# EAGLE board CMSIS-DAP (EAGLE 6.1)
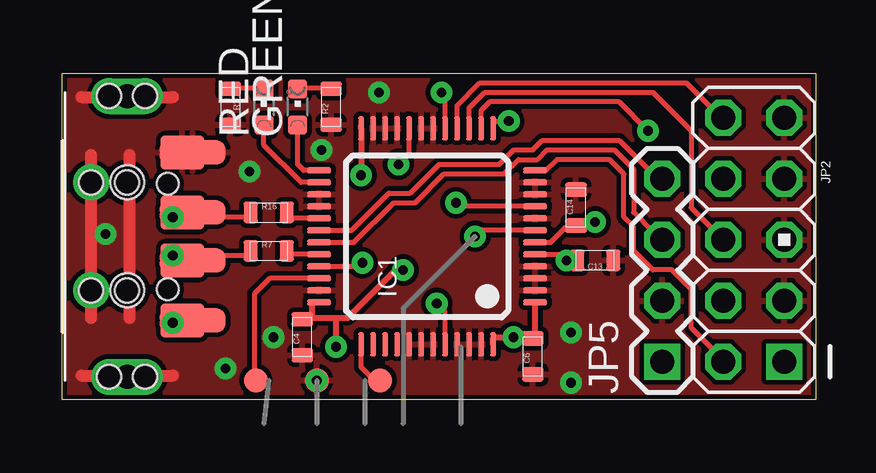
[diagram p0: board, top side]
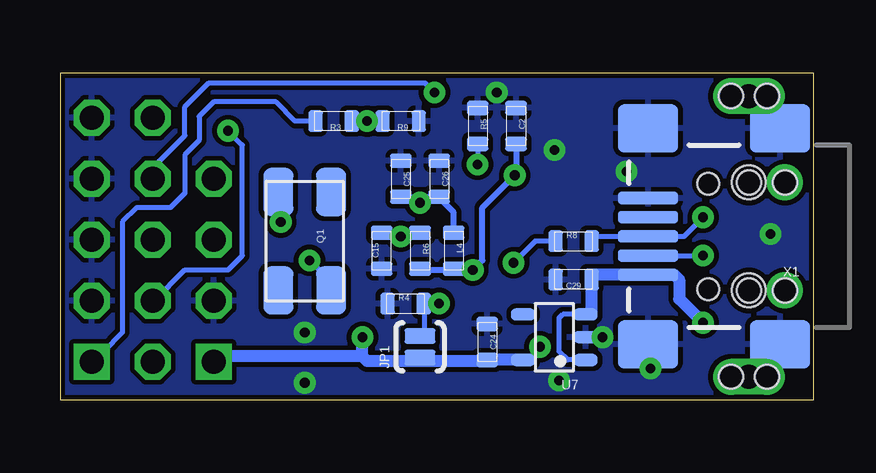
[diagram p1: board, bottom side, seen from below]

Size 31.4 x 13.6 mm. Coordinates in mm from the lower left corner, seen from the top.
Outline: 0,0 0,13.6 31.4,13.6 31.4,0 0,0
Copper layers (1*16): Top 0.035mm / dielectric 1.5mm / Bottom 0.035mm
Design rules: minimum track width 0.2mm, minimum drill 0.4mm, track to track 0.2mm, track to pad 0.2mm, pad to pad 0.2mm, via to via 0.2mm, smd to smd 0mil, copper to edge 0.2mm, drill to drill 0.2mm, minimum pad ring 0.25mm, minimum via ring 0.25mm, stop-mask expansion 4mil, vias tented up to drill 0.4mm, thermal gap 0.2mm

## Footprints (pad centres in the part's own frame; a part is rotated, then mirrored left to right if it is on the bottom)
0603 = smd 0.6 x 0.9: 1 -0.75,0; 2 0.75,0
PAD.1X1 = smd 1 x 1: P$1 0,0
CHIPLED_0603 = smd 0.8 x 0.8: A 0,-0.75; C 0,0.75
TQFP48 = smd 0.25 x 1: 1 -2.75,-4.5; 2 -2.25,-4.5; 3 -1.75,-4.5; 4 -1.25,-4.5; 5 -0.75,-4.5; 6 -0.25,-4.5; 7 0.25,-4.5; 8 0.75,-4.5; 9 1.25,-4.5; 10 1.75,-4.5; 11 2.25,-4.5; 12 2.75,-4.5; 25 2.75,4.5; 26 2.25,4.5; 27 1.75,4.5; 28 1.25,4.5; 29 0.75,4.5; 30 0.25,4.5; 31 -0.25,4.5; 32 -0.75,4.5; 33 -1.25,4.5; 34 -1.75,4.5; 35 -2.25,4.5; 36 -2.75,4.5 | smd 1 x 0.25: 13 4.5,-2.75; 14 4.5,-2.25; 15 4.5,-1.75; 16 4.5,-1.25; 17 4.5,-0.75; 18 4.5,-0.25; 19 4.5,0.25; 20 4.5,0.75; 21 4.5,1.25; 22 4.5,1.75; 23 4.5,2.25; 24 4.5,2.75; 37 -4.5,2.75; 38 -4.5,2.25; 39 -4.5,1.75; 40 -4.5,1.25; 41 -4.5,0.75; 42 -4.5,0.25; 43 -4.5,-0.25; 44 -4.5,-0.75; 45 -4.5,-1.25; 46 -4.5,-1.75; 47 -4.5,-2.25; 48 -4.5,-2.75
USBAP-1P = smd 1.4 x 1.8: D+ 1,-5; D- -1,-5; GND 3.5,-5; VBUS -3.5,-5 | drill 1: P$1 -2.25,-1.2; P$2 -2.25,-2.7; P$3 2.25,-1.2; P$4 2.25,-2.7 | hole 1: -2.25,-1.2; 2.25,-1.2; 2.25,-2.7; -2.25,-2.7
USB-A-SMD = smd 2.75 x 1: D+ 5.325,1; D- 5.325,-1; GND 5.325,3.5; VUSB 5.325,-3.5 | drill 1 pad 1.4 long: GND@1 2.6,5.85; GND@2 2.6,-5.85 | hole 1: 3.35,-5.85; 1.85,-5.85; 3.35,5.85; 1.85,5.85 | hole 1.4: 2.6,2.25; 2.6,-2.25
SJ_2S-NO = smd 0.635 x 1.27: 1 -0.45,0; 2 0.45,0
AVR_ICSP = drill 1 pad 1.5 square: 1 -1.27,5.08 | drill 1 pad 1.5 octagon: 2 1.27,5.08; 3 -1.27,2.54; 4 1.27,2.54; 5 -1.27,0; 6 1.27,0; 7 -1.27,-2.54; 8 1.27,-2.54; 9 -1.27,-5.08; 10 1.27,-5.08
1X04 = drill 1 pad 1.5 square: 1 0,0 | drill 1 pad 1.5 octagon: 2 2.54,0; 3 5.08,0; 4 7.62,0
KX-9A = smd 2 x 1.25: 1 -2.05,-1.1; 2 2.05,-1.1; 3 2.05,1.1; 4 -2.05,1.1
PAD.03X.03 = smd 0.762 x 0.762: P$1 0,0
SOT23-5 = smd 0.5 x 1: 1 -0.95,-1.3; 2 0,-1.3; 3 0.95,-1.3; 4 0.95,1.3; 5 -0.95,1.3
USB-MINIB = smd 2.5 x 0.5: D+ 2.5,0; D- 2.5,0.8; GND 2.5,-1.6; ID 2.5,-0.8; VBUS 2.5,1.6 | smd 2.5 x 2: GND@1 -3,-4.5; GND@2 -3,4.5; GND@3 2.5,4.5; GND@4 2.5,-4.5 | hole 0.9: 0,2.2; 0,-2.2

## Placement (x,y rotation side)
C2  0.1u  [0603]  12.4,11.4 270 bottom
C4  0.1u  [0603]  10,2.6 90 top
C6  0.1u  [0603]  19.6,1.8 90 top
C13  20p  [0603]  22.2,5.8 180 top
C14  20p  [0603]  21.4,8 90 top
C15  0.1u  [0603]  18,6.2 90 bottom
C24  4.7u  [0603]  13.6,2.4 270 bottom
C25  10n  [0603]  17.2,9.2 270 bottom
C26  2.2u  [0603]  15.6,9.2 270 bottom
C29  4.7u  [0603]  10,5 180 bottom
GND  [PAD.1X1]  10.6,0.8 0 top
GREEN  [CHIPLED_0603]  9.8,12.2 0 top
IC1  STM32F103CBT6  [TQFP48]  15.2,6.8 90 top
J2  USB-4-AP-1P  [USBAP-1P]  0,6.8 90 top
J3  USB-4-A-SMD  [USB-A-SMD]  0.1,6.8 0 top
JP1  [SJ_2S-NO]  16.4,2.2 90 bottom
JP2  M05X2PTH  [AVR_ICSP]  28.81,6.66 180 top
JP5  [1X04]  25,1.58 90 top
L4  BEAD 600  [0603]  15,6.2 270 bottom
Q1  8M  [KX-9A]  21.2,6.6 270 bottom
R1  1K  [0603]  7,12.2 270 top
R2  1K  [0603]  11.2,12.2 90 top
R3  10K  [0603]  20,11.6 180 bottom
R4  100K  [0603]  17,4 0 bottom
R5  100K  [0603]  14,11.4 270 bottom
R6  10K  [0603]  16.4,6.2 270 bottom
R7  22  [0603]  8.6,6.2 0 top
R8  22  [0603]  10,6.6 0 bottom
R9  10K  [0603]  17.2,11.6 180 bottom
R16  1K5  [0603]  8.6,7.8 0 top
RED  [CHIPLED_0603]  8.4,12.2 0 top
RESET#  [PAD.03X.03]  17.2,6.8 270 bottom
SWCLK  [PAD.1X1]  13.24,0.8 0 top
SWDIO  [PAD.1X1]  8.06,0.8 0 top
U7  TPS73033  [SOT23-5]  10.8,2.6 90 bottom
X1  USB-SMD  [USB-MINIB]  4.4,6.8 180 bottom

## Library data of the parts
C2 C4 C6 C13-C15 C24-C26 C29 J2 J3 L4 Q1 R1-R9 R16 U7 X1 = X893
GND JP1 JP2 JP5 RESET# SWCLK SWDIO = SparkFun
GREEN RED = led
IC1 = stm32

## Nets
BOOT0: IC1.44 JP1.2 R4.2
GND: C2.1 C4.1 C6.1 C13.1 C14.2 C15.1 C24.1 C25.1 C26.1 C29.2 GND.P$1 IC1.2 IC1.3 IC1.4 IC1.8 IC1.10 IC1.11 IC1.18 IC1.19 IC1.21 IC1.22 IC1.23 IC1.27 IC1.28 IC1.35 IC1.41 IC1.42 IC1.43 IC1.45 IC1.46 IC1.47 J2.GND J3.GND JP2.3 JP2.5 JP2.7 JP2.9 JP5.2 R1.2 R2.1 R4.1 R5.1 R9.1 U7.2 X1.GND X1.GND@1 X1.GND@2 X1.GND@3 X1.GND@4
N$2: R1.1 RED.C
N$3: C25.2 C26.2 IC1.9 L4.1
N$10: J2.D- J3.D- R7.1 X1.D-
N$12: GREEN.C R2.2
N$13: J2.D+ J3.D+ R8.2 R16.1 X1.D+
OSCIN: C14.1 IC1.6 Q1.1
OSCOUT: C13.2 IC1.5 Q1.3
PA2-SWDIO/TMS: IC1.12 JP2.2
PA3-VREF: IC1.13 R3.1 R9.2
PA4-SWCLK/TCK: IC1.14 JP2.4
PA5-SWO/TDO: IC1.15 JP2.6
PA6-NRESET: IC1.16 JP2.10
PA7-TDI: IC1.17 JP2.8
PA8: IC1.29 R16.2
PA9: IC1.30 JP5.4
PA10: IC1.31 JP5.3
PA11: IC1.32 R7.2
PA12: IC1.33 R8.1
PA13-SWDIO: IC1.34 SWDIO.P$1
PA14-SWCLK: IC1.37 SWCLK.P$1
PB2/BOOT1: IC1.20 R5.2
PB12: GREEN.A IC1.25
PB13: IC1.26 RED.A
RESET#: C15.2 IC1.7 R6.1 RESET#.P$1
VDD: C2.2 C4.2 C6.2 C24.2 IC1.1 IC1.24 IC1.36 IC1.48 JP1.1 JP5.1 L4.2 R6.2 U7.5
VEE: C29.1 J2.VBUS J3.VUSB U7.1 U7.3 X1.VBUS
VTREF: JP2.1 R3.2

## Tracks (layer width: path | path; a pad name or v marks a point on that pad's centre or on a via)
BOOT0  (via drill 0.4)
  Top 0.2: 15.8,3.8 v15.6,4 15.95,3.65 IC1.44
  Bottom 0.2: R4.2 16.2,4 | 16.2,4 v15.6,4 | JP1.2 16.2,2.65 16.2,4
GND  (via drill 0.4)
  Top 0.4: J2.GND J3.GND
  Top 0.5: 0.8,12.6 4.6,12.6 | 0.8,1 4.6,1 | 2.8,3.4 2.8,10.2 | 1.2,3.4 1.2,10.2
  other vias: 8.8,2.6 10.6,0.8 10.8,10.4 21.2,2.8 13.2,12.8 21.2,0.7 6.8,1.3 7.8,9.5 1.8,6.9
  pour Top: 0,13.6 0,0 31.4,0 31.4,13.6
  pour Bottom: 0,13.6 0,0 31.4,0 31.4,13.6
N$2
  Top 0.2: R1.1 7,13 8.4,13 RED.C
N$3  (via drill 0.4)
  Top 0.2: IC1.9 16.65,8.05 v16.4,8.2
  Bottom 0.2: C25.2 16.35,8.45 | 16.45,8.45 v16.4,8.2 16.35,8.45 | C26.2 16.35,8.45
  Bottom 0.25: L4.1 15,7.8 15.6,8.4 15.75,8.4 C26.2
N$10  (via drill 0.4)
  Top 0.2: J2.D- 4.8,5.8 v4.6,6 7.8,6 7.8,6.2 R7.1
  Top 0.4: J2.D- J3.D-
  Bottom 0.2: X1.D- v4.6,6
N$12
  Top 0.2: GREEN.C 9.8,13 11.15,13 R2.2
N$13  (via drill 0.4)
  Top 0.2: J2.D+ 4.8,7.8 v4.6,7.6 7.8,7.6 7.8,7.8 R16.1
  Top 0.4: J2.D+ J3.D+
  Bottom 0.2: v4.6,7.6 5.4,6.8 X1.D+ 9.2,6.8 9.2,6.6 R8.2
OSCIN  (via drill 0.4)
  Top 0.2: IC1.6 20.35,6.55 21,7.2 21.4,7.2 C14.1 21.4,7.4 v22.2,7.4
  Bottom 0.2: Q1.1 22.3,7.5 v22.2,7.4
OSCOUT  (via drill 0.4)
  Top 0.2: C13.2 v21,5.8 20.75,6.05 IC1.5
  Bottom 0.2: Q1.3 20.3,4.5 20.6,4.8 20.6,5.4 v21,5.8
PA2-SWDIO/TMS
  Top 0.2: JP2.2 27.4,1.72 27.4,1.8 26.2,3 26.2,4.6 25.4,5.4 24.6,5.4 23.8,6.2 23.8,7.2 23.4,7.6 23.4,9.4 22.8,10 20.6,10 20.15,9.55 IC1.12
PA3-VREF  (via drill 0.4)
  Top 0.2: IC1.13 R9.2 v18.6,11.6
  Bottom 0.2: R3.1 v18.6,11.6 R9.2
PA4-SWCLK/TCK  (via drill 0.4)
  Top 0.2: v24.4,11.2 23.2,12.4 17.8,12.4 17.45,12.05 IC1.14
  Bottom 0.2: JP2.4 27.48,4.12 26.2,5.4 24.4,5.4 23.8,6 23.8,10.6 v24.4,11.2
PA5-SWO/TDO
  Top 0.2: IC1.15 16.95,12.15 17.6,12.8 24.6,12.8 26.2,11.2 26.2,8 27.4,6.8 27.4,6.72 JP2.6
PA6-NRESET
  Top 0.2: IC1.16 16.45,12.25 17.4,13.2 26,13.2 27.2,12 27.28,12 JP2.10
PA7-TDI  (via drill 0.4)
  Top 0.2: IC1.17 15.95,12.65 v15.8,12.8
  Bottom 0.2: JP2.8 27.4,9.2 27.4,9.8 26.2,11 26.2,12.2 25.2,13.2 16.2,13.2 v15.8,12.8
PA8
  Top 0.2: IC1.29 9.45,7.55 9.4,7.6 R16.2
PA9
  Top 0.2: IC1.30 12.05,7.05 13.6,8.6 14.5,8.6 15.7,9.8 18.2,9.8 18.8,10.4 19.6,10.4 20,10.8 23.2,10.8 24.6,9.4 24.8,9.4 JP5.4
PA10
  Top 0.2: IC1.31 12.15,6.55 13.8,8.2 14.7,8.2 15.9,9.4 18.4,9.4 19,10 19.8,10 20.2,10.4 23,10.4 23.8,9.6 23.8,7.8 24.6,7 24.66,7 JP5.3
PA11
  Top 0.2: IC1.32 9.4,6.05 R7.2
PA12  (via drill 0.4)
  Top 0.2: v12.5,5.7 12.35,5.55 IC1.33
  Bottom 0.2: R8.1 11.6,6.6 v12.5,5.7
PA13-SWDIO
  Top 0.2: IC1.34 8.65,5.05 8,4.4 8,0.8 SWDIO.P$1
PA14-SWCLK
  Top 0.2: IC1.37 12.45,1.35 13,0.8 SWCLK.P$1
PB2/BOOT1  (via drill 0.4)
  Top 0.2: v14,9.8 14.45,10.25 IC1.20
  Bottom 0.2: R5.2 v14,9.8
PB12
  Top 0.2: IC1.25 10.05,9.55 9.8,9.8 GREEN.A
PB13
  Top 0.2: IC1.26 9.95,9.05 8.4,10.6 RED.A
RESET#  (via drill 0.4)
  Top 0.2: IC1.7 17.45,7.05 RESET#.P$1
  Bottom 0.2: R6.1 16.65,6.8 RESET#.P$1 17.45,6.95 C15.2
  other vias: 17.2,6.8
VDD  (via drill 0.4)
  Top 0.2: 19.55,2.6 C6.2
  Top 0.25: IC1.1 19.7,2.67 C6.2 | IC1.36 10.4,4.05 10.4,3.4 | 10.4,3.4 10,3.4 C4.2 | IC1.48 17.95,2.55 18,2.6 v18.8,2.6 19.55,2.6 | 10.4,3.4 11.4,3.4 | 11.4,3.4 v11.4,2.2 | 11.4,3.4 11.9,3.4 13.9,5.4 v14.2,5.4 | 12.45,11.4 IC1.24 v12.45,9.35
  Bottom 0.25: U7.5 11.75,1.65 11.4,2 v11.4,2.2 | R6.2 16.4,5.4 15,5.4 | 15,5.4 v14.2,5.4 13.8,5.8 13.8,8 v12.45,9.35 12.4,9.6 C2.2 | L4.2 15,5.4
  Bottom 0.5: U7.5 13.55,1.65 13.6,1.6 | C24.2 13.6,1.6 | 13.6,1.6 16.4,1.6 | 16.4,1.6 18.6,1.6 18.8,1.8 | 18.8,1.8 v18.8,2.6 | JP1.1 16.4,1.6 | 18.8,1.8 24.98,1.8 JP5.1
VEE  (via drill 0.4)
  Top 0.4: J2.VBUS J3.VUSB
  Top 0.5: J2.VBUS 4.7,3.3 v4.6,3.2
  Bottom 0.2: U7.1 10.25,1.65 10.6,2 10.6,3.4 10.45,3.55 U7.3
  Bottom 0.5: v4.6,3.2 5.6,4.2 5.6,5 5.8,5.2 X1.VBUS 9.05,5.2 C29.1 9.25,3.55 U7.3
VTREF
  Bottom 0.2: R3.2 21.6,11.6 22.4,12.4 25,12.4 25.6,11.8 25.6,10.8 26.2,10.2 26.2,8.6 26.8,8 28.2,8 28.8,7.4 28.8,2.8 29.6,2 29.66,2 JP2.1

## Text on the board
tDocu: PA9-USART1_TX | PA10-USART1_RX | GND | LED | GREEN | +3.3V | RED | PA6-nRESET | GND | PA7-TDI | GND | PA5-SWO/TDO | GND | MiniUSB | PA4-SWCLK/TCK | GND | USB-A or | PA2-SWDIO/TMS | PA3-VTREF | PA13-SWDIO | GND | PA14-SWCLK | RESET | BOOT0